# Altium PCB PCB1.PcbDoc (part 1 of 2)
Units mm, origin at the board's own origin, x right, y up, seen from the top; angles counter-clockwise.
Board outline 143.92 x 105.38 mm, 2 copper layers (Top Layer, Bottom Layer); 71 components, 60 nets, 252 pads, 1765 vias.
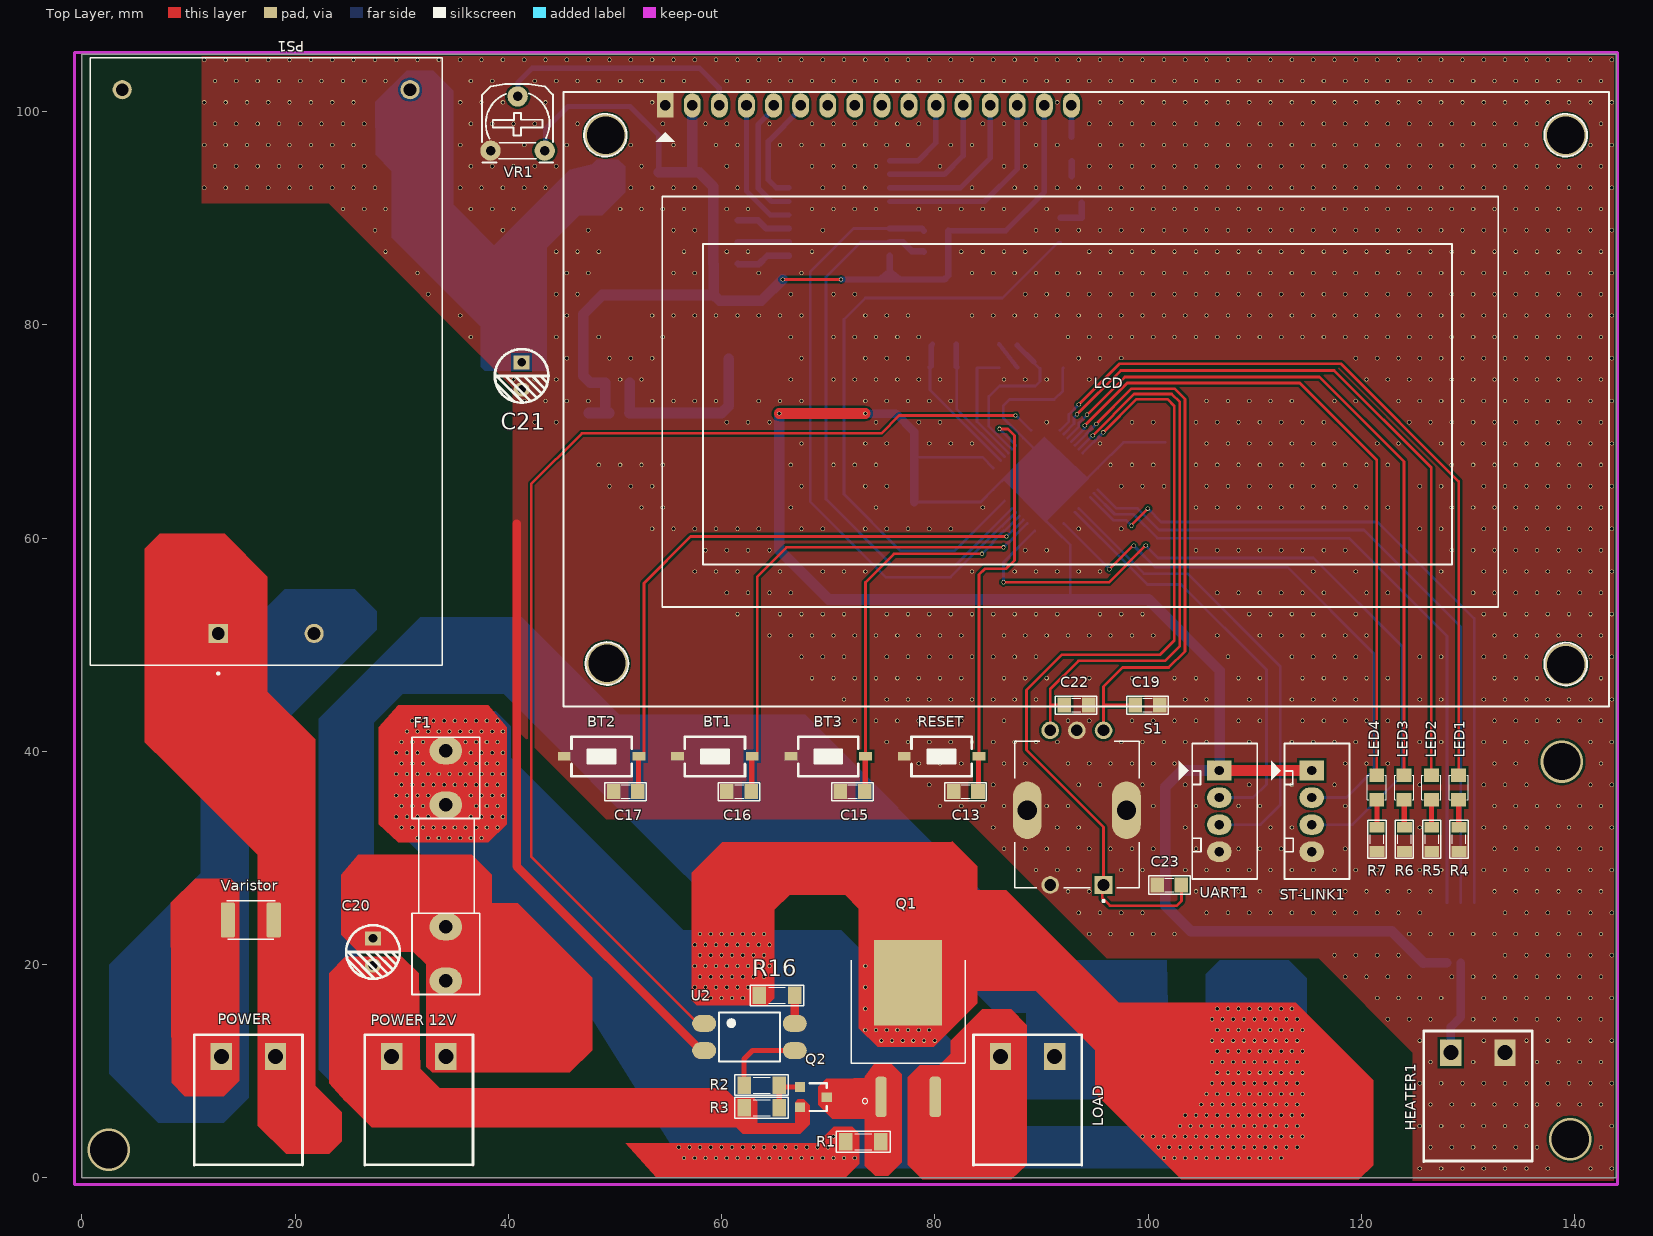
[diagram p0: Top Layer view]
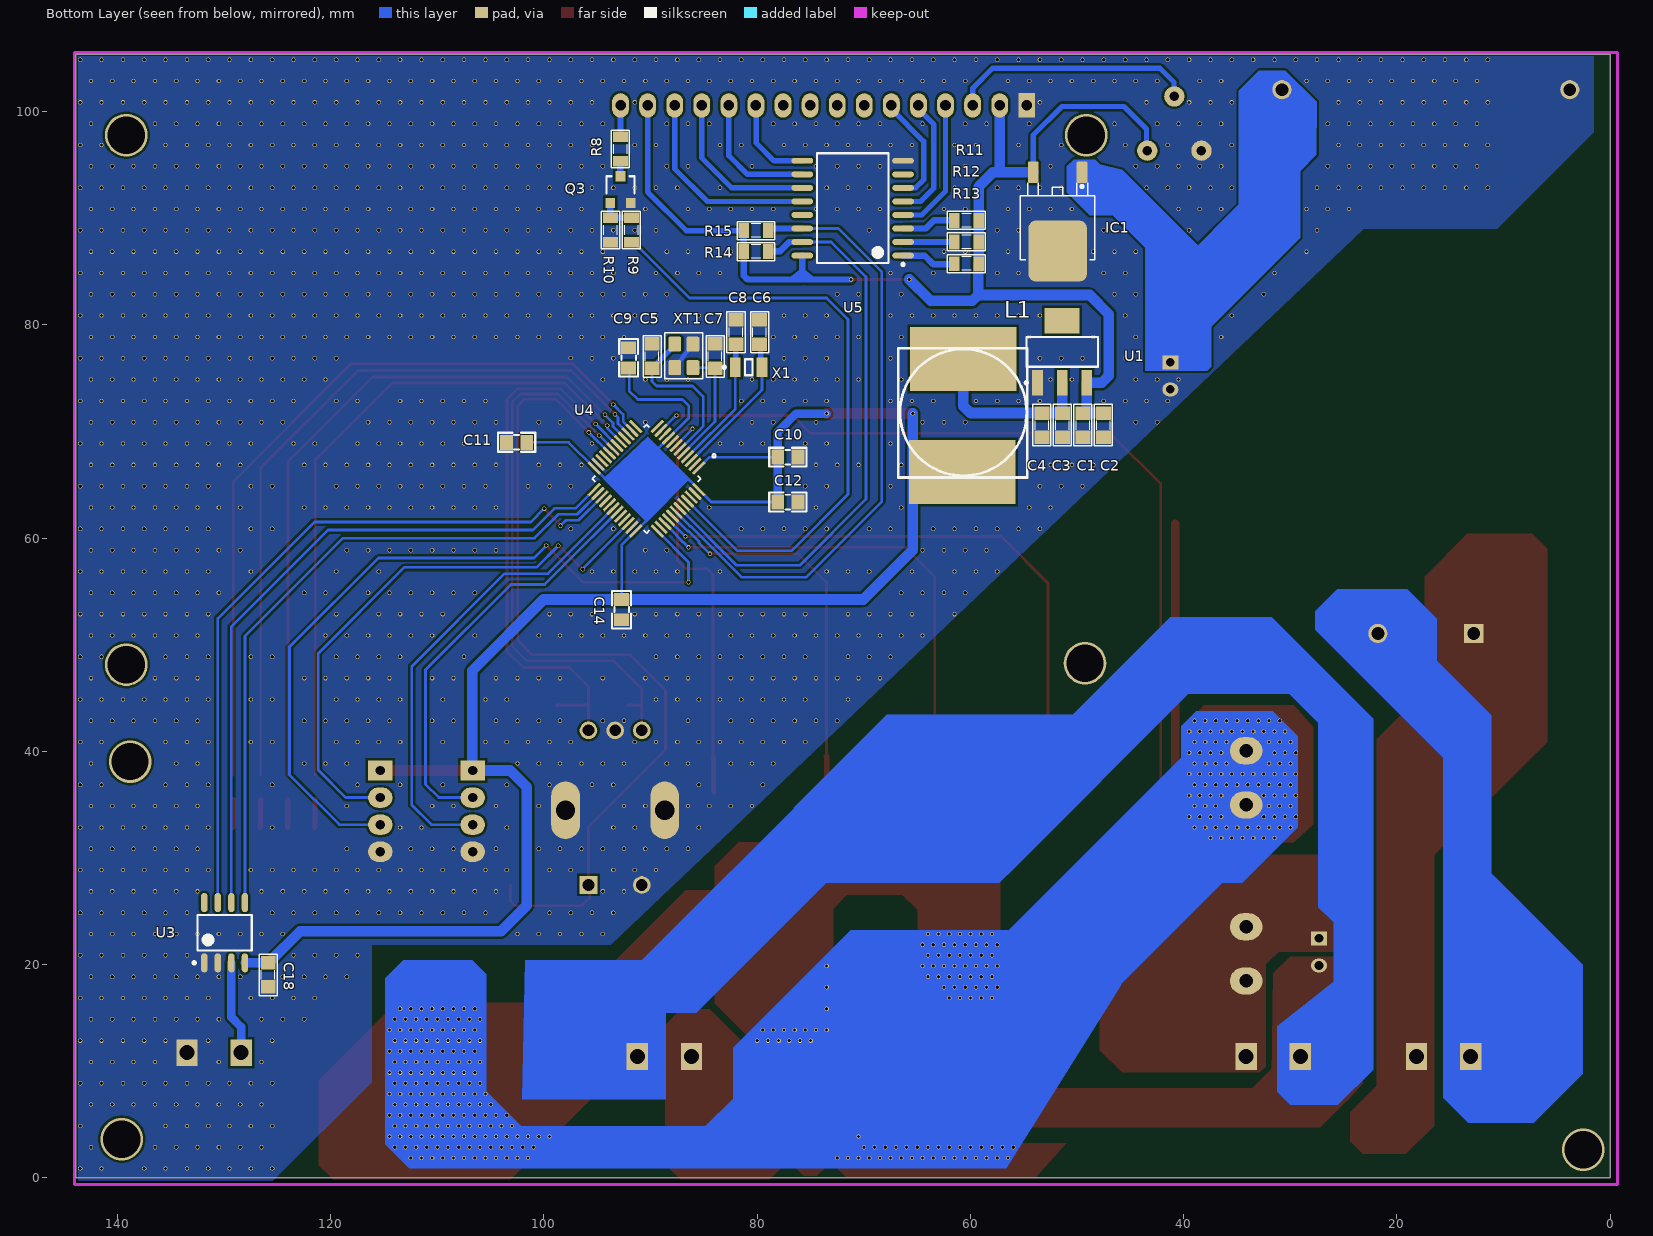
[diagram p1: Bottom Layer view, seen from below]

## Layer stack, top to bottom
Top Solder: solder mask 0.0102, Solder Resist, Dk 3.5
Top Layer: signal copper 0.0356
Dielectric 1: dielectric 0.32, FR-4, Dk 4.8
Bottom Layer: signal copper 0.0356
Bottom Solder: solder mask 0.0102, Solder Resist, Dk 3.5

## Board outline
0,0 143.916,0 143.916,105.385 0,105.385

## Design rules (kind name [scope] priority, off if disabled: settings)
Clearance [All] p1: gap=0.21 ignorepadtopadclearanceinfootprint=FALSE
HoleSize [All] p1: absolutevalues=TRUE maxlimit=10 minlimit=0.025 maxpercent=80.000 minpercent=20.000
PlaneConnect [All] p1: planeconnectstyle=Direct reliefexpansion=0.508 reliefentries=4 reliefconductorwidth=0.254 reliefairgap=0.254
PolygonConnect [All] p1: connectstyle=Direct reliefconductorwidth=0.254 reliefentries=4 polygonreliefangle="90 Angle" airgapwidth=0.254
RoutingVias [All] p1: holewidth=0 width=0 viastyle="Through Hole" minholewidth=0.1 minwidth=0.3 maxholewidth=0.711 maxwidth=10
SolderMaskExpansion [All] p1: expansion=0.102 istentingtop=FALSE
Width [All] p1: maxlimit=5 minlimit=0.254 preferedwidth=0.254 minimp=50.000000 maximp=50.000000 favimp=50.000000
28 further rules are at their usual default settings.

## Components (designator, comment, footprint, x,y, rotation, side; value= is the part's Value field where it differs from the comment)
BT1 "SW-SMD" SW-SMD 59.373,39.522 r180 top
BT2 "SW-SMD" SW-SMD 48.743,39.522 r180 top
BT3 "SW-SMD" SW-SMD 70.004,39.522 r180 top
C1 "1uF" 0805 49.448,70.587 r270 bottom
C2 "10uF" 0805 47.532,70.587 r270 bottom
C3 "1uF" 0805 51.364,70.587 r270 bottom
C4 "10uF" 0805 53.281,70.587 r270 bottom
C5 "18pF" 0805 89.865,77.064 r90 bottom
C6 "18pF" 0805 79.784,79.316 r90 bottom
C7 "18pF" 0805 83.947,77.064 r90 bottom
C8 "18pF" 0805 81.994,79.316 r90 bottom
C9 "10nF" "tu 0805" 92.05,76.911 r270 bottom
C10 "10nF" "tu 0805" 77.114,67.589 r0 bottom
C11 "10nF" "tu 0805" 102.565,68.986 r180 bottom
C12 "10nF" "tu 0805" 77.114,63.373 r0 bottom
C13 "0.1uF" 0805 82.903,36.22 r0 top
C14 "10nF" "tu 0805" 92.71,53.289 r90 bottom
C15 "0.1uF" 0805 72.273,36.22 r0 top
C16 "0.1uF" 0805 61.642,36.22 r0 top
C17 "0.1uF" 0805 51.012,36.22 r0 top
C18 "0.1uF" 0805 125.857,19.05 r90 bottom
C19 "0.1uF" 0805 99.949,44.348 r0 top
C20 "100uF" "tu hoa 5mm" 27.305,21.184 r270 top
C21 "100uF" "tu hoa 5mm" 41.25,75.209 r270 top
C22 "0.1uF" 0805 93.269,44.348 r0 top
C23 "0.1uF" 0805 101.981,27.457 r180 top
F1 "520" "De Cau Chi 520 630" 34.138,29.261 r90 top
HEATER1 "Header 2" "BIG_Header 2" 133.477,11.735 r180 top
IC1 "LM78xx" TO252-123 51.816,90.619 r0 bottom
L1 "100uH - 3A SMD" "Cuon Cam 12x12x10" 54.657,77.792 r0 bottom
LCD "LCD 2004" "LCD 2004" 54.712,100.584 r0 top
LED1 "LED" LED-0805-Red 129.129,37.747 r270 top value="LED 3 - 5 ly 2 Colour"
LED2 "LED" LED-0805-Red 126.568,37.747 r270 top value="LED 3 - 5 ly 2 Colour"
LED3 "LED" LED-0805-Red 124.007,37.747 r270 top value="LED 3 - 5 ly 2 Colour"
LED4 "LED" LED-0805-Red 121.445,37.747 r270 top value="LED 3 - 5 ly 2 Colour"
LOAD "Header 2" "BIG_Header 2" 91.237,11.379 r180 top
POWER "Header 2" "BIG_Header 2" 18.161,11.379 r180 top
"POWER 12V" "Header 2" "BIG_Header 2" 34.138,11.379 r180 top
PS1 "HLK-20M12" CONV_HLK-20M12 17.285,76.557 r90 top
Q1 "IRF3709" D2PAK 77.495,13.995 r0 top
Q2 "2N222" SOT23-231 68.605,7.569 r270 top value=C1815
Q3 "2N222" SOT23-231 92.819,92.687 r180 bottom value=C1815
R1 "2.2K" RES-SMD-1206 73.279,3.378 r0 top
R2 "10K" RES-SMD-1206 63.754,8.687 r0 top
R3 "10K" RES-SMD-1206 63.754,6.579 r180 top
R4 "2K" RES-SMD-0805 129.167,31.753 r270 top
R5 "2K" RES-SMD-0805 126.606,31.753 r270 top
R6 "2K" RES-SMD-0805 124.045,31.753 r270 top
R7 "2K" RES-SMD-0805 121.484,31.753 r270 top
R8 "220R" RES-SMD-0805 92.829,96.492 r270 bottom
R9 "10K" RES-SMD-0805 91.779,88.897 r270 bottom
R10 "10K" RES-SMD-0805 93.769,88.897 r90 bottom
R11 "10K" RES-SMD-0805 60.373,89.797 r0 bottom
R12 "10K" RES-SMD-0805 60.373,87.765 r0 bottom
R13 "10K" RES-SMD-0805 60.373,85.733 r0 bottom
R14 "10K" RES-SMD-0805 80.109,86.868 r180 bottom
R15 "10K" RES-SMD-0805 80.109,88.832 r180 bottom
R16 "5K" RES-SMD-1206 65.202,17.12 r180 top
RESET "SW-SMD" SW-SMD 80.634,39.522 r180 top
S1 "482016514001" SW_482016514001 93.32,34.468 r90 top
ST-LINK1 "Header4" Header4 115.341,38.202 r270 top
U1 "LM1117-3.3V" SOT223 51.398,77.474 r180 bottom
U2 "OPTO PC817 SMD" SOP4 62.611,13.208 r0 top value=PC817
U3 "MAX6675" SO8 129.946,22.987 r90 bottom
U4 "STM32F103C8T6" QFP50P900X900X160-48N 90.373,65.557 r315 bottom
U5 "PCF8574" SO16L 71.041,90.94 r0 bottom
UART1 "Header4" Header4 106.68,38.202 r270 top
Varistor "2A 24V" "Cau chi tu phuc hoi 2A 24V SMD1812" 15.85,24.181 r0 top
VR1 "100K" "Bien Tro Tam Giac Dung" 38.329,96.342 r0 top
X1 "32.768Khz" XT2-32.768KHz-2_V 80.797,76.022 r180 bottom value=4Mhz
XT1 "8Mhz" "Thach Anh 4 chan 1" 86.868,77.089 r90 bottom value=4Mhz

## Footprints (in the part's own frame and the unit in brackets; to place one, negate y for a bottom-side part, rotate by r counter-clockwise, add the part's x,y. Pads: shape width x height; smd on the part's side, far side on the other; paste and mask are expansions set on the pad)
0805 [mil] "Compoment SMD 80x50mil"
  rect 50x55 smd: 1(-45,0) 2(45,0)
  silkscreen extent -77,-34 76,33, body extent -40,-27 40,23, height 24
"Bien Tro Tam Giac Dung" [mil] "RM065"
  round 75 hole 35: 1(0,0) 2(100,200) 3(200,0)
  silkscreen extent -31,-44 231,246, body extent -28,-50 228,228, height 279
"BIG_Header 2" [mm]
  rect 2x2.5 hole 1.4: 1(0,0) 2(5.08,0)
  silkscreen extent -2.54,-2.03 7.62,10.21, body extent -2.5,-1.75 7.58,10.25, height 3.15
"Cau chi tu phuc hoi 2A 24V SMD1812" [mm]
  rrect25% 1.34x3.29 smd: 1(-2.15,0) 2(2.15,0)
  silkscreen extent -2.28,-1.83 2.28,1.83, body extent -2.27,-1.62 2.27,1.62, height 1.25
CONV_HLK-20M12 [mm]
  rect 1.8x1.8 hole 1.2: 1(-25.5,4.5)
  round 1.8 hole 1.2: 2(-25.5,-4.5) 3(25.5,13.5) 4(25.5,-13.5)
  silkscreen extent -29.35,-16.5 28.5,16.5, body extent -28.5,-16.5 28.5,16.5, height 27.5
"Cuon Cam 12x12x10" [mm] "Cuon Cam 12x12x10"
  rect 10x6 smd: 1(6.1,11.6) 2(6,1)
  silkscreen extent 0,0 12.1,12.1, body extent 0.1,-0.2 12.1,12.14, height 7.51
D2PAK [mm]
  rrect53% 1.06x3.78 smd: 1(-2.54,-6.4) 3(2.54,-6.4)
  rect 6.39x8 smd paste-5 mask+0: 2(0,4.29)
  silkscreen extent -5.34,-7.05 5.34,6.42, body extent -5.08,-6.35 5.08,8.89, height 4.83
"De Cau Chi 520 630" [mil] "De Fuse"
  oval 100x120 hole 50: 1(-425,0) 1(-225,0) 2(225,0) 2(425,0)
  silkscreen extent -475,-125 475,125, body extent -448,-117 459,127, height 378
Header4 [mil] "CON4"
  rect 75x90 hole 34: 1(0,0)
  oval 75x90 hole 34: 2(100,0) 3(200,0) 4(300,0)
  silkscreen extent -100,-150 400,140, body extent -90,-90 398,136, height 276
"LCD 2004" [mil] "LCD dipslay 20x4, 16 pin"
  rect 62x90 hole 39: 1(0,0)
  oval 62x90 hole 39: 2(100,0) 3(200,0) 4(300,0) 5(400,0) 6(500,0) 7(600,0) 8(700,0) 9(800,0) 10(900,0) 11(1000,0) 12(1100,0) 13(1200,0) 14(1300,0) 15(1400,0) 16(1500,0)
  round 157.48 hole 137.8: "Hole 0"(-220,-110) "Hole 0"(-215,-2060) "Hole 0"(3325,-2065) "Hole 0"(3325,-110)
  silkscreen extent -375,-2220 3485,50, body extent -392,-2264 3466,98, height 1008
LED-0805-Red [mil]
  rect 50x55 smd: 1(0,0) 2(90,0)
  silkscreen extent 0,-35 90,35, body extent 5,-25 85,25, height 43
QFP50P900X900X160-48N [mm]
  rrect50% 1.56x0.28 smd: 1(-4.18,2.75) 2(-4.18,2.25) 3(-4.18,1.75) 4(-4.18,1.25) 5(-4.18,0.75) 6(-4.18,0.25) 7(-4.18,-0.25) 8(-4.18,-0.75) 9(-4.18,-1.25) 10(-4.18,-1.75) 11(-4.18,-2.25) 12(-4.18,-2.75) 25(4.18,-2.75) 26(4.18,-2.25) 27(4.18,-1.75) 28(4.18,-1.25) 29(4.18,-0.75) 30(4.18,-0.25) 31(4.18,0.25) 32(4.18,0.75) 33(4.18,1.25) 34(4.18,1.75) 35(4.18,2.25) 36(4.18,2.75)
  rrect50% 0.28x1.56 smd: 13(-2.75,-4.18) 14(-2.25,-4.18) 15(-1.75,-4.18) 16(-1.25,-4.18) 17(-0.75,-4.18) 18(-0.25,-4.18) 19(0.25,-4.18) 20(0.75,-4.18) 21(1.25,-4.18) 22(1.75,-4.18) 23(2.25,-4.18) 24(2.75,-4.18) 37(2.75,4.18) 38(2.25,4.18) 39(1.75,4.18) 40(1.25,4.18) 41(0.75,4.18) 42(0.25,4.18) 43(-0.25,4.18) 44(-0.75,4.18) 45(-1.25,4.18) 46(-1.75,4.18) 47(-2.25,4.18) 48(-2.75,4.18)
  silkscreen extent -6.15,-3.6 3.6,3.6, body extent -4.5,-4.5 4.5,4.5, height 1.6
RES-SMD-0805 [mil]
  rect 39.37x55 smd: 1(-45,0) 2(45,0)
  silkscreen extent -70,-34 70,33, body extent -39,-25 39,25, height 31
RES-SMD-1206 [mil]
  rect 50x65 smd: 1(-65,0) 2(65,0)
  silkscreen extent -99,-38 99,39, body extent -63,-31 63,32, height 40
SO8 [mm] "SOIC, 8-Leads, Body 4.9x3.9mm, Pitch 1.27mm, IPC High Density"
  oval 1.8x0.6 smd: 1(-2.825,1.905) 2(-2.825,0.635) 3(-2.825,-0.635) 4(-2.825,-1.905) 5(2.825,-1.905) 6(2.825,-0.635) 7(2.825,0.635) 8(2.825,1.905)
  silkscreen extent -2.95,-2.55 1.68,2.98, body extent -2.99,-2.45 3,2.45, height 1.6
SO16L [mm] "SOIC, 16-Leads, Body 10.30x7.50mm, Pitch 1.27mm, IPC Medium Density"
  oval 2.032x0.55 smd: 1(-4.725,4.445) 2(-4.725,3.175) 3(-4.725,1.905) 4(-4.725,0.635) 5(-4.725,-0.635) 6(-4.725,-1.905) 7(-4.725,-3.175) 8(-4.725,-4.445) 9(4.725,-4.445) 10(4.725,-3.175) 11(4.725,-1.905) 12(4.725,-0.635) 13(4.725,0.635) 14(4.725,1.905) 15(4.725,3.175) 16(4.725,4.445)
  silkscreen extent -4.85,-5.15 3.35,5.39, body extent -5.15,-5.17 5.16,5.16, height 2.48
SOP4 [mm]
  oval 2.25x1.6 smd: 1(-4.25,1.27) 2(-4.25,-1.27) 3(4.25,-1.27) 4(4.25,1.27)
  silkscreen extent -2.85,-2.3 2.85,2.3, body extent -4.67,-2.29 4.93,2.31, height 3.6
SOT23-231 [mm]
  rect 0.9x0.95 smd mask+0: 1(0.95,-1.25)
  rect 0.9x0.95 smd: 2(-0.95,-1.25) 3(0,1.25)
  silkscreen extent -1.3,-0.38 1.3,1.25, body extent -1.52,-1.23 1.48,1.27, height 1.06
SOT223 [mm]
  rect 1x2.4 smd: 1(-2.3,-2.9) 2(0,-2.9) 3(2.3,-2.9)
  rect 3.3x2.4 smd: 4(0,2.9)
  silkscreen extent -3.48,-3.02 3.35,1.4, body extent -3.25,-3.56 3.25,3.4, height 1.68
SW-SMD [mm] "Switch SMD type"
  rect 1.2x0.8 smd: 1(-3.5,0) 2(3.5,0)
  silkscreen extent -2.82,-1.85 2.82,1.85, body extent -3.05,-1.85 3.05,1.85, height 2.5
SW_482016514001 [mm]
  rect 1.65x1.65 hole 1.1: 1(-7,-2.5)
  round 1.65 hole 1.1: 2(-7,2.5) A(7.5,-2.5) B(7.5,2.5) C(7.5,0)
  oval 5.4x2.7 hole 1.8: S1(0,4.65) S2(0,-4.65)
  silkscreen extent -8.6,-5.85 6.5,5.85, body extent -7.25,-5.85 7.6,5.85, height 31.6
"Thach Anh 4 chan 1" [mm] "SMD Crystal 4-lead leadless package"
  round 0.508 on Mech15: 0(0,0)
  rrect25% 1.4x1.2 smd: 1(-1.1,-0.85) 2(1.1,-0.85) 3(1.1,0.85) 4(-1.1,0.85)
  Top Layer lines w0.4: 1.1,-0.85 -1.1,0.85
  silkscreen extent -2.16,-1.78 2.16,1.78, body extent -1.65,-1.3 1.65,1.3, height 0.8
TO252-123 [mm]
  round 0.5 on Mech15: 0(0,0)
  rrect25% 1x2 smd: 1(-2.285,-3.7) 3(2.285,-3.7)
  rrect25% 5.5x5.7 smd: 2(0,3.7)
  silkscreen extent -3.5,-2.7 3.5,4.5, body extent -3.3,-3.95 3.3,5.76, height 2.31
"tu 0805" [mm] "Compoment SMD 80x50mil"
  rect 1.2x1.4 smd: 1(-0.946,-0.003) 2(0.954,-0.003)
  silkscreen extent -1.75,-0.89 1.75,0.89, body extent -1.01,-0.64 1.01,0.63, height 0.61
"tu hoa 5mm" [mm]
  rect 1.3x1.5 hole 0.8: 1(-1.27,0)
  oval 1.3x1.5 hole 0.8: 2(1.27,0)
  silkscreen extent -2.51,-2.51 2.51,2.51, body extent -3.12,-3.18 3.23,3.18, height 14.55
XT2-32.768KHz-2_V [mm] "Hand Drawn, 2-Leads, Body 3.2x1.5mm, Pitch 2.5mm"
  rect 1x1.8 smd: 1(-1.25,0) 2(1.25,0)
  silkscreen extent -2.43,-0.75 0.35,0.75, body extent -1.6,-0.75 1.6,0.75, height 0.9

## Part data
BT1 BT2 BT3 RESET: "Switch", LatestRevisionDate=17-Jul-2002, LatestRevisionNote="Re-released for DXP Platform.", PackageReference=SPST-2, Published=24-Mar-1999, Publisher="Altium Limited"
C1 C2 C3 C4 C5 C6 C7 C8 C13 C15 C16 C17 C18 C19 C22 C23: library part "CAP 0805", Bottom=10, Right=20
C9 C10 C11 C12 C14: library part "Tu 0805 101 50V 20%", "Dán", Chung_Loai=Dán, Don_Vi=Con, Ma_Hang=MH002806, So_Chan=2, Ten_Linh_Kien="Tụ 0805 101-0.1nF 50V 20%"
C20 C21: library part "Tu Hoa 100uF 25V 6x11", "Cắm", Chung_Loai=Cắm, Don_Vi=Con, Ma_Hang=MH001351, So_Chan=2, Ten_Linh_Kien="Tụ Hóa 100uF 25V 6x11MM"
F1: library part "De Cau Chi 520 630", "5x20mm", Ma_Hang=MH001473, Ten="Đế Cầu Chì 5x20MM 6x30MM SMD01"
HEATER1 LOAD POWER "POWER 12V": "Big Header 2"
IC1: "Positive Voltage Regulator", ComponentLink1Description="Manufacturer Link", ComponentLink1URL=http://www.st.com/, ComponentLink2Description=Datasheet, ComponentLink2URL=http://www.st.com/stonline/products/literature/ds/2146/l78m05c.pdf, DatasheetVersion=Apr-1994, LatestRevisionDate=17-Jul-2002, LatestRevisionNote="Re-released for DXP Platform.", Note="Tab is connected to pin 3 (GND).", PackageDescription="TO, Thru-Hole, Vertical, Heatsink Mounted; 3 In-Line Leads; Pitch 2.54 mm; Pin sequence 1, 3, 2", PackageReference=ISOWATT220AB, PackageVersion=Jul-1998, Published=24-Aug-2001, Publisher="Altium Limited"
L1: library part "CUON CAM 100uH SMD", "Dán", Chung_Loai=Dán, Don_Vi=Con, Ten_Linh_Kien="Cuộn Cảm 100uH 7x7x4MM CD74"
LCD: library part "LCD 2004 5V", "LCD 2004 5V Xanh Dương", CHIP=HD44780, Don Vi Mua=Nshop, Ma_Hang=WVEZ, Ten="LCD 2004 Xanh Dương"
LED1 LED2 LED3 LED4: library part "LED SMD"
PS1: "20W ultra-small series module power supply", Package="Non-Standard Hi-link", Availability="Not in stock", Check_prices=https://www.snapeda.com/parts/HLK-20M12/Hi-link/view-part/?ref=eda, MF=Hi-link, MP=HLK-20M12, Price=None, SnapEDA_Link=https://www.snapeda.com/parts/HLK-20M12/Hi-link/view-part/?ref=snap
Q1: library part "IRF3709S SMD", "N-Channel Power MOSFET"
Q2 Q3: "NPN 600mW, ECB"
R1 R2 R3 R4 R5 R6 R7 R8 R9 R10 R11 R12 R13 R14 R15 R16: library part Res-SMD, "Resistor", Manufacturer="Generic Components", Class=Passive, Published=08/06/2000, Publisher="Altium Hobart Technology Centre"
S1: "Rotary Encoder Mechanical 15 Quadrature (Incremental) Vertical", Package=None, Availability="In Stock", Check_prices=https://www.snapeda.com/parts/482016514001/Wurth+Electronics+Inc./view-part/?ref=eda, MF="WÃ¼rth Elektronik", MP=482016514001, Price=None, Purchase-URL=https://pricing.snapeda.com/search/part/482016514001/?ref=eda, SnapEDA_Link=https://www.snapeda.com/parts/482016514001/Wurth+Electronics+Inc./view-part/?ref=snap
ST-LINK1 UART1: "Header IDC, 4 x 1 Pin Vertical 2.54mm Pitch (Non-Boxed, Male)", Manufacturer="W¨¹rth Elektronik eiSos GmbH", partNo=613002143121, ComponentLink1 Description=Manufacturer, ComponentLink1URL=http://www.we-online.com, ComponentLink2 Description=Datasheet, ComponentLink2URL=http://katalog.we-online.de/em/datasheet/6130xx143121.pdf, Created by="Karrer Zheng", Created Date="29 March 2013", NoPins=02
U1: library part LM1117, "800mA Low-Dropout Linear Regulator", Creator="Nguyen Ba Bien", Website=http://group3i.net
U2: "Single Opto"
U3: "Half-Bridge Driver"
U4: "ARMÂ® CortexÂ®-M3 STM32F1 Microcontroller IC 32-Bit 72MHz 64KB (64K x 8) FLASH 48-LQFP (7x7)", Package="LQFP-48 STMicroelectronics", Availability="In Stock", Check_prices=https://www.snapeda.com/parts/STM32F103C8T6/STMicroelectronics/view-part/?ref=eda, MF=STMicroelectronics, MP=STM32F103C8T6, Price=None, Purchase-URL=https://pricing.snapeda.com/search/part/STM32F103C8T6/?ref=eda, SnapEDA_Link=https://www.snapeda.com/parts/STM32F103C8T6/STMicroelectronics/view-part/?ref=snap
U5: "I2C PORT EXPANDER", Frequency - Clock=100KHz, Manufacturer="NXP Semiconductors", Manufacturer Part Number=PCF8574T/3,512, Operating Temperature="-40°C ~ 85°C", Package / Case="16-SOIC (7.5mm Width)", Supplier Part Number=568-1076-5-ND, Voltage - Supply="2.5 V ~ 6 V", Category="Integrated Circuits (ICs)", Includes=POR, Interface=I²C, Interrupt Output=Yes, Number of I /O=8, Packaging=Tube, RoHS="RoHS Compliant", Supplier=Digi-Key, Supplier 1=Digi-Key, Supplier Part Number 1=568-1076-5-ND
Varistor: library part "Cau chi tu phuc hoi 2A 24V SMD1812", "2A 24V SMD1812", Ma_Hang=MH010033, Ten="Cầu Chì Tự Phục Hồi 2A 24V SMD1812"
VR1: library part "Bien tro tam giac 100K Dung", "Cắm", Chung_Loai=Cắm, Don_Vi=Con, Ma_Hang=MH003711, Ten_Linh_Kien="Biến Trở Tam Giác 104-100K RM065"
X1: library part XT2, "Crystal, 32.768 KHz, -40 to 85 degC, 3.2 x 1.5 x 0.9 mm SMD"
XT1: library part "Thach Anh 4 Chan SMD", "Crystal For all Crystal 2pin."

## Via types
v1: diameter 0.4, hole 0.3, Top Layer to Bottom Layer, tented both sides, 1762 vias
v2: diameter 4, hole 3.5, Top Layer to Bottom Layer, 3 vias

## Nets (pads, with @x,y where several pads share a name; then routed paths per layer and width w, separated by ;. In a path a pad name is that pad's centre, name@x,y a point inside that pad or via, vN(x,y) a via of type N, cw(c..) or ccw(c..) an arc to the next point about the centre after c; other vN are vias at no path point)
3.3: C9.2 C10.2 C11.2 C12.2 C14.2 C18.2 L1.1 ST-LINK1.1 U3.4 U4.1 U4.9 U4.24 U4.36 U4.48 UART1.1 | length 198.8
  Top Layer w1: v1(65.405,71.679) v1(73.482,71.679) ; UART1.1@106.68,38.202 ST-LINK1.1@115.341,38.202
  Bottom Layer w0.254: C12.2@78.069,63.376 84.303,63.376 U4.48@85.473,64.546 86.882,65.956 ; C10.2@78.069,67.593 84.449,67.593 U4.1@85.473,66.569 ; 88.519,65.278 89.814,63.983 91.03,65.198 91.03,65.227 89.897,66.361 89.897,67.802 U4.9@88.301,69.397 86.411,71.288 86.411,72.39 87.02,73 91.186,73 91.999,73.812 91.999,75.903 C9.2@92.053,75.957 ; 90.194,61.848 U4.36@91.384,60.657 92.707,59.335 C14.2@92.707,54.244 ; 94,65.298 95.271,66.569 U4.24@95.273,66.569 97.688,68.983 C11.2@101.611,68.983 ; C18.2@125.793,20.193 C18.2@125.857,20.193
  Bottom Layer w0.5: UART1.1@106.68,38.202 UART1.1@106.731,38.252 ; C18.2@125.857,20.193 C18.2@125.872,20.178 ; U3.4@128.026,20.178 U3.4@128.041,20.162
  Bottom Layer w0.8: v1(73.482,71.679) 76.352,71.679 78.069,69.962 C10.2@78.069,67.593 C12.2@78.069,63.376
  Bottom Layer w0.9: C18.2@125.872,20.178 U3.4@128.026,20.178
  Bottom Layer w1: v1(65.405,71.679) 65.405,58.877 70.039,54.244 C14.2@92.707,54.244 100.036,54.244 106.731,47.549 UART1.1@106.731,38.252 ; UART1.1@106.68,38.202 103.149,38.202 101.6,36.652 101.6,25.549 104.024,23.125 122.862,23.125 C18.2@125.793,20.193
+5: C1.1 C2.1 IC1.3 LCD.2 LCD.15 R11.1 R12.1 R13.1 R14.1 R15.1 U1.3 U5.16 VR1.3 | length 114.7
  Top Layer w0.254: v1(65.735,84.252) v1(71.196,84.252)
  Bottom Layer w0.5: VR1.3@43.485,96.418 43.485,98.374 45.593,100.482 51.41,100.482 54.101,97.791 IC1.3@54.101,94.319 ; 75.542,84.252 75.766,84.252 ; R15.1@81.252,88.832 86.647,88.832 90.272,92.456 LCD.15@90.272,100.584
  Bottom Layer w0.6: v1(71.196,84.252) 75.542,84.252 ; U5.16@75.766,86.495 75.766,84.252 80.901,84.252 81.252,84.603 R14.1@81.252,86.868 R15.1@81.252,88.832
  Bottom Layer w1: VR1.3@43.409,96.342 VR1.3@43.485,96.418 ; C2.1@47.532,71.73 C1.1@49.448,71.73 49.098,72.08 U1.3@49.098,74.574 47.676,74.574 47.015,75.235 47.015,81.001 48.819,82.804 59.258,82.804 ; IC1.3@54.101,94.319 57.404,94.319 ; LCD.2@57.252,100.584 57.252,94.471 57.404,94.319 ; v1(65.735,84.252) 63.729,82.245 59.817,82.245 59.258,82.804 ; 57.404,94.319 57.878,94.319 59.23,92.967 R11.1@59.23,89.797 R12.1@59.23,87.765 R13.1@59.23,85.733 59.258,85.705 59.258,82.804
+12: C21.1 IC1.1 PS1.4